# Altium PCB 50VBoost.PcbDoc
Units mm, origin at the board's own origin, x right, y up, seen from the top; angles counter-clockwise.
Board outline 61 x 24 mm, 2 copper layers (Top Layer, Bottom Layer), stack 1.57 mm thick; 18 components, 11 nets, 49 pads, 76 vias.
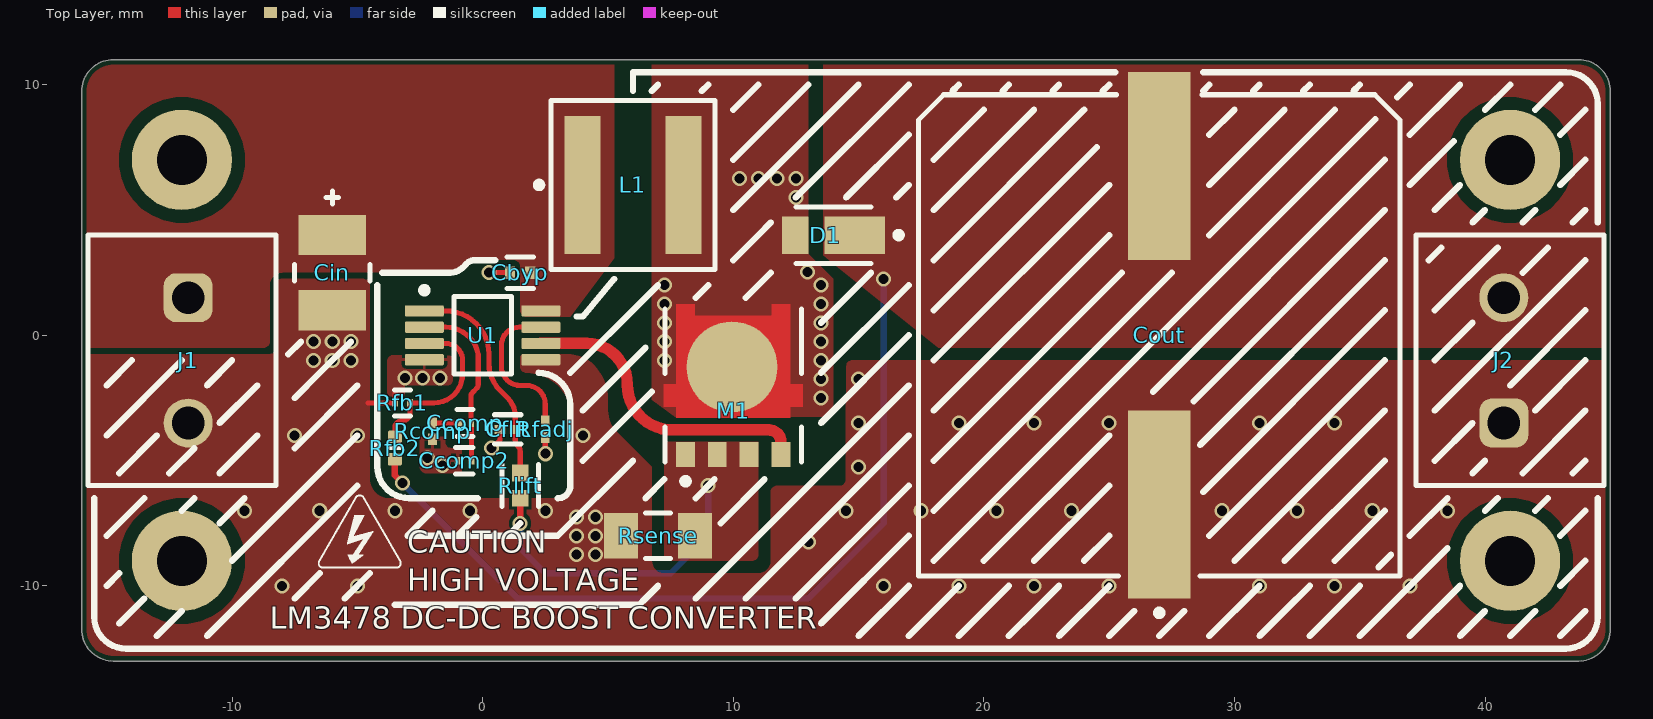
[diagram p0: Top Layer view]
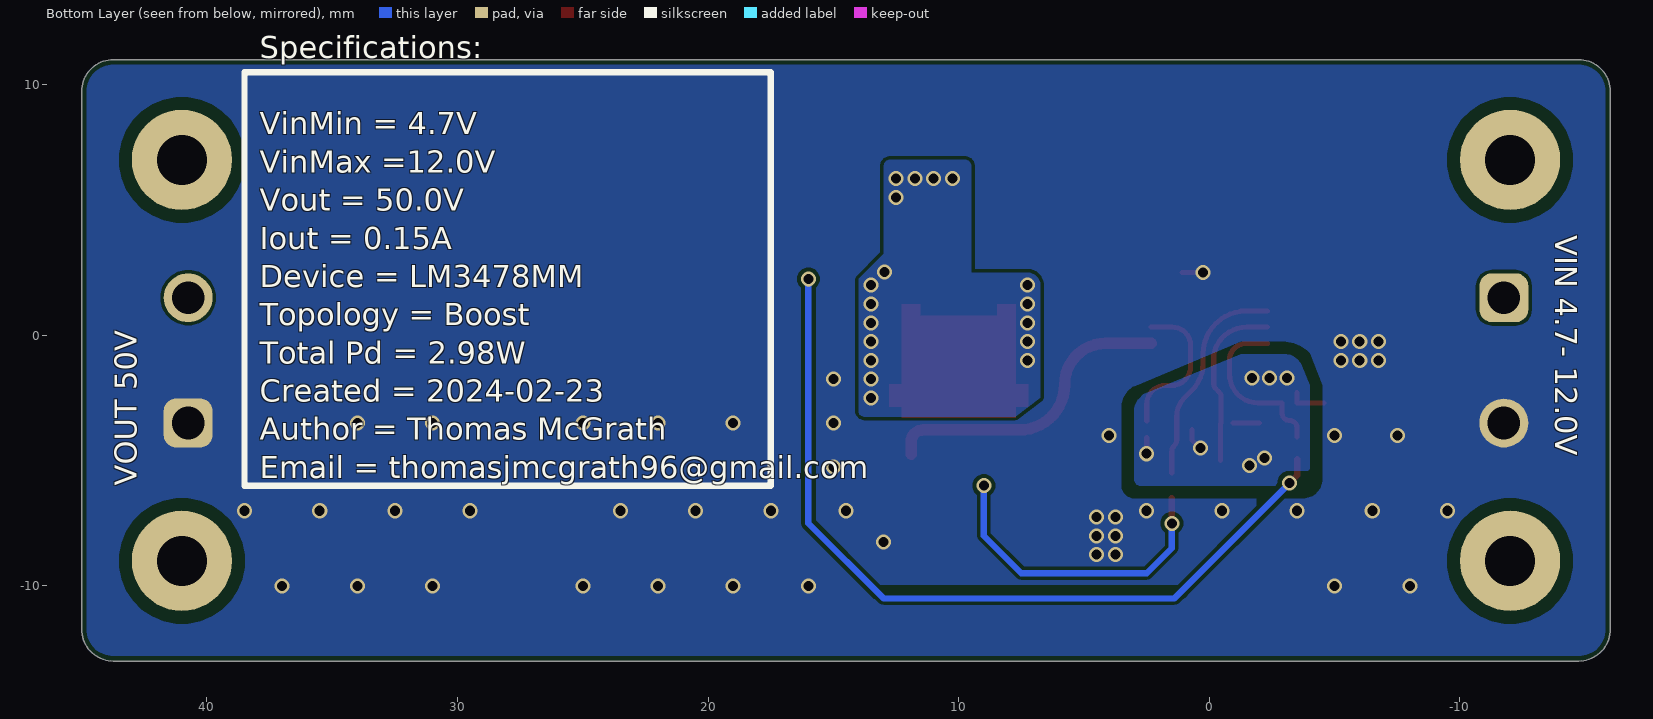
[diagram p1: Bottom Layer view, seen from below]
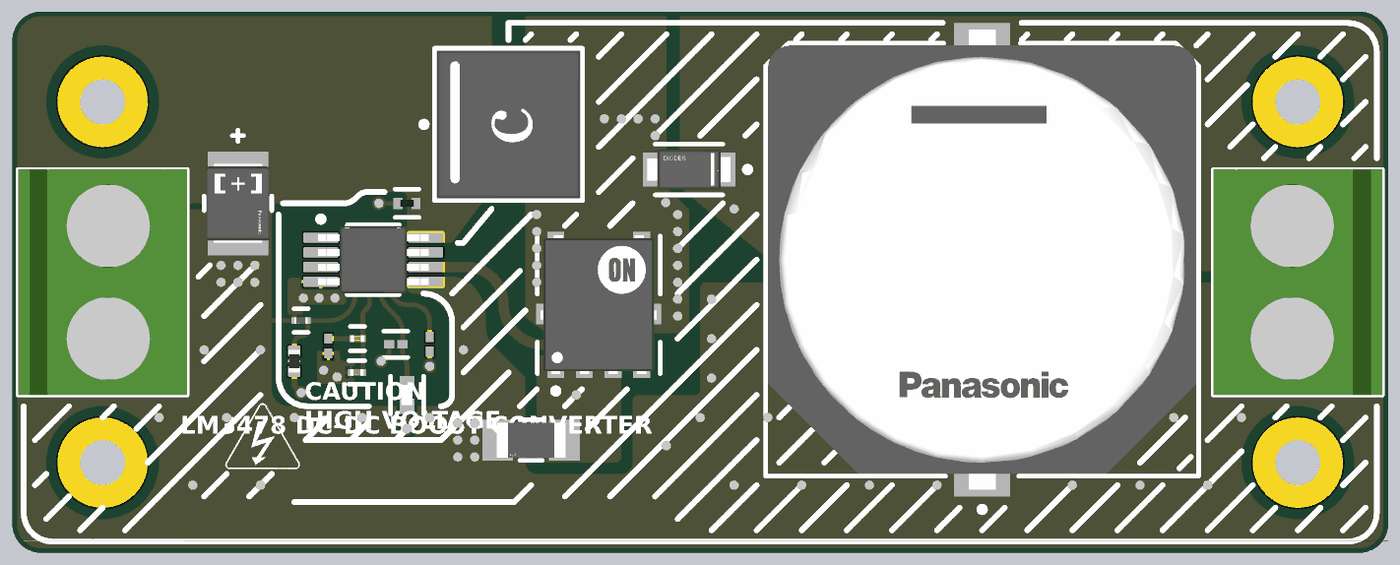
[diagram p2: 3D render of the assembled board from above, using the file's embedded part models]

## Layer stack, top to bottom
Top Solder: solder mask 0.0127, Solder Resist, Dk 3.8
Top Layer: signal copper 0.035
Dielectric: core 1.5, FR-4, Dk 4.5
Bottom Layer: signal copper 0.035
Bottom Solder: solder mask 0.0127, Solder Resist, Dk 3.8

## Board outline
-16,-11.73 ccw(c-14.73,-11.73) -14.73,-13 43.73,-13 ccw(c43.73,-11.73) 45,-11.73 45,9.73 ccw(c43.73,9.73) 43.73,11 -14.73,11 ccw(c-14.73,9.73) -16,9.73

## Design rules (kind name [scope] priority, off if disabled: settings)
BoardOutlineClearance [All] p1: gap=0.2 ignorepadtopadclearanceinfootprint=FALSE
Clearance [All] p1: gap=0.127 ignorepadtopadclearanceinfootprint=FALSE except(0.25: Arc-Hole Track-Hole SMDPad-Hole THPad-Hole Via-Hole Fill-Hole Poly-Hole Region-Hole Text-Hole)
ComponentClearance [All] p1: gap=0.127 collisioncheckmode=3 verticalgap=0.127 showdistances=TRUE
DiffPairsRouting [All] p1: maxlimit=0.254 minlimit=0.127 mostfreqgap=0.127 toplayer_minwidth=0.127 toplayer_maxwidth=25.4 toplayer_prefwidth=0.127 bottomlayer_minwidth=0.127 bottomlayer_maxwidth=25.4 bottomlayer_prefwidth=0.127 maxuncoupledlength=12.7
Height [All] p1: minheight=0 maxheight=1816.048 prefheight=12.7
HoleSize [All] p1: absolutevalues=TRUE maxlimit=6.3 minlimit=0.3 maxpercent=80.000 minpercent=20.000
HoleToHoleClearance [All] p1: gap=0.25 allowstackedmicrovias=FALSE
MinimumAnnularRing [All] p1: minimumring=0.076
MinimumSolderMaskSliver [All] p1: minsoldermaskwidth=0
PlaneClearance [All] p1: clearance=0.127
PlaneConnect PlaneConnectPowerPads [InPadClass('PowerPads')] p1: planeconnectstyle=Direct reliefexpansion=0.508 reliefentries=4 reliefconductorwidth=0.254 reliefairgap=0.254
PlaneConnect [All] p2: pad.planeconnectstyle=Relief pad.reliefexpansion=0.3 pad.reliefentries=4 pad.reliefconductorwidth=0.127 pad.reliefairgap=0.127 via.planeconnectstyle=Direct via.reliefexpansion=0.3 via.reliefentries=4 via.reliefconductorwidth=0.127 via.reliefairgap=0.127
PolygonConnect PolygonConnect_1 [All vs IsNamedPolygon('+9V_L01_P007') Or IsNamedPolygon('+50_L01_P009') Or IsNamedPolygon('GND_L01_P003') Or IsNamedPolygon('MOS_D_L01_P008') Or IsNamedPolygon('MOS_S_L01_P004') Or IsNamedPolygon('GND_L02_P002') Or IsNamedPolygon('GND_L02_P014') Or IsNamedPolygon('MOS_D_L02_P011')] p1: connectstyle=Direct reliefconductorwidth=0.254 reliefentries=4 polygonreliefangle="90 Angle" airgapwidth=0.254
PolygonConnect PolygonConnectPowerPads [All vs (InPadClass('PowerPads'))] p2: connectstyle=Direct reliefconductorwidth=0.254 reliefentries=4 polygonreliefangle="90 Angle" airgapwidth=0.254
PolygonConnect [All] p3: thpad.connectstyle=Relief thpad.reliefconductorwidth=0.127 thpad.reliefentries=4 thpad.polygonreliefangle="90 Angle" thpad.airgapwidth=0.127 smdpad.connectstyle=Relief smdpad.reliefconductorwidth=0.127 smdpad.reliefentries=4 smdpad.polygonreliefangle="90 Angle" smdpad.airgapwidth=0.127 via.connectstyle=Direct via.reliefconductorwidth=0.127 via.reliefentries=4 via.polygonreliefangle="90 Angle" via.airgapwidth=0.127
RoutingVias [All] p1: holewidth=0.3 width=0.6 viastyle="Through Hole" minholewidth=0.3 minwidth=0.6 maxholewidth=0.6 maxwidth=6.6
SilkToSilkClearance [All] p1: silktosilkclearance=0
SilkToSolderMaskClearance [IsPad] p1: minsilkscreentomaskgap=0.127 clearancetoexposedcopper=TRUE
SolderMaskExpansion [All] p1: expansion=0.075 istentingtop=FALSE
Width [All] p1: maxlimit=25.4 minlimit=0.127 preferedwidth=0.127 minimp=50.000000 maximp=50.000000 favimp=50.000000
20 further rules are at their usual default settings.

## Components (designator, comment, footprint, x,y, rotation, side; value= is the part's Value field where it differs from the comment)
Cbyp "GRM155R71C104KA88D" FP-GRM15-MFG 1.5,2.5 r180 top value=100nF
Ccomp "GRM033R71C391KA01D" FP-GRM033-0_03-MFG -0.7,-3.5 r180 top value=390pF
Ccomp2 "CGA1A2X7R1H331K030BA" FP-CGA1A-0_1-0_03-MFG -0.725,-5 r180 top value=330pF
Cflit "CL02C560JQ2ANNC" FP-CL02-IPC_A 1,-3.75 r180 top value=56pF
Cin "22uf" FP-POSCAP-B2-MFG -6,2.5 r90 top
Cout "EEV-FK2A221M" FP-FKK16-MFG 27,0 r90 top value=220uF
D1 "DFLS12007" FP-PowerDI123-MFG 14,4 r0 top value=23pF
J1 "691137710002" 691137710002 -12,-1 r270 top
J2 "691137710002" 691137710002 41,-1 r90 top
L1 "XAL6060-103MEB" FP-XAL6060-MFG 6,6 r0 top value=10uH
M1 "NVMFS6B14NLT1G" FP-488AA-MFG 10,-2 r0 top
Rcomp "162k" RESC0603X26X15NL03T05 -2,-3.825 r270 top
Rfadj "ERJ-1GEF1212C" RESC0603X26X15NL03T05 2.5,-3.75 r270 top value=12.1kR
Rfb1 "ERJ-1GNF1002C" FP-ERJ1G-MFG -3.2,-2.7 r180 top value=10kR
Rfb2 "Resistor 383K +/-1 % 0402 63 mW" RESC0402(1005)_L -3.5,-4.5 r270 top value=383k
Rlift "CRCW0402100RFKED" FP-CRCW0402-e3-IPC_A 1.5,-6 r270 top value=100R
Rsense "CSR1206FK20L0" FP-CSR1206-IPC_A 7,-8 r180 top value=20mR
U1 "LM3478MM/NOPB" DGK0008A_M 0,0 r0 top

## Footprints (in the part's own frame and the unit in brackets; to place one, negate y for a bottom-side part, rotate by r counter-clockwise, add the part's x,y. Pads: shape width x height; smd on the part's side, far side on the other; paste and mask are expansions set on the pad)
691137710002 [mm] "Horizontal Cable Entry with Pressure Clamp, pitch 5mm, 02p"
  rrect50% 1.95x1.95 hole 1.3: 1(-2.5,0.25)
  round 1.95 hole 1.3: 2(2.5,0.25)
  silkscreen extent -5,-3.75 5,3.75, body extent -5,-3.75 5,3.75, height 11.6
DGK0008A_M [mm] "TSOP, 8-Leads, Body 3.1x3.1mm, Pitch 0.65mm, IPC Low Density"
  rrect22% 1.55x0.45 smd: 1(-2.325,0.975) 2(-2.325,0.325) 3(-2.325,-0.325) 4(-2.325,-0.975) 5(2.325,-0.975) 6(2.325,-0.325) 7(2.325,0.325) 8(2.325,0.975)
  silkscreen extent -2.45,-1.55 1.15,1.92, body extent -2.45,-1.5 2.45,1.5, height 0.94
FP-488AA-MFG [mm]
  rect 0.75x1 smd paste+0 mask+0: 1(-1.905,-2.748) 2(-0.635,-2.748) 3(0.635,-2.748) 4(1.905,-2.748)
  round 3.631 smd paste+0 mask+0: 5-6(-0.05,0.735)
  Top Layer region: -2.28,-1.282 -2.28,-0.857 -2.775,-0.857 -2.775,0.048 -2.28,0.048 -2.28,3.247 -1.53,3.247 -1.53,2.772 1.53,2.772 1.53,3.247 2.28,3.247 2.28,0.048 2.775,0.048 2.775,-0.857 2.28,-0.857 2.28,-1.282
  silkscreen extent -2.73,-3.95 2.73,3.05, body extent -2.88,-3.35 2.88,3.35, height 0.25
FP-CGA1A-0_1-0_03-MFG [mm]
  rect 0.25x0.3 smd paste+0 mask+0: 1(-0.275,0) 2(0.275,0)
  silkscreen extent -0.35,-0.53 0.35,0.53, body extent -0.5,-0.3 0.5,0.3, height 0.25
FP-CL02-IPC_A [mm]
  rect 0.456x0.361 smd paste+0 mask+0: 1(-0.303,0) 2(0.303,0)
  silkscreen extent -0.53,-0.58 0.53,0.58, body extent -0.73,-0.38 0.73,0.38, height 0.25
FP-CRCW0402-e3-IPC_A [mm]
  rect 0.668x0.672 smd paste+0 mask+0: 1(-0.502,0) 2(0.502,0)
  silkscreen extent -0.84,-0.74 0.84,0.74, body extent -1.04,-0.54 1.04,0.54, height 0.25
FP-CSR1206-IPC_A [mm]
  rect 1.356x1.808 smd paste+0 mask+0: 1(-1.476,0) 2(1.476,0)
  silkscreen extent -0.5,-0.9 0.5,0.9, body extent -2.65,-1.4 2.65,1.4, height 0.25
FP-ERJ1G-MFG [mm]
  rect 0.25x0.3 smd paste+0 mask+0: 1(-0.3,0) 2(0.3,0)
  silkscreen extent -0.32,-0.53 0.31,0.53, body extent -0.53,-0.27 0.52,0.27, height 0.25
FP-FKK16-MFG [mm]
  rect 7.5x2.5 smd paste+0 mask+0: 1(-6.75,0) 2(6.75,0)
  silkscreen extent -11.2,-9.6 9.6,9.6, body extent -10.75,-9.85 10.75,9.85, height 0.25
FP-GRM15-MFG [mm]
  rect 0.4x0.5 smd paste+0 mask+0: 1(-0.4,0) 2(0.4,0)
  silkscreen extent -0.53,-0.63 0.53,0.63, body extent -0.7,-0.38 0.7,0.38, height 0.25
FP-GRM033-0_03-MFG [mm]
  rect 0.25x0.3 smd paste+0 mask+0: 1(-0.238,0) 2(0.238,0)
  silkscreen extent -0.31,-0.54 0.32,0.54, body extent -0.46,-0.27 0.46,0.27, height 0.25
FP-POSCAP-B2-MFG [mm]
  rect 1.6x2.7 smd paste+0 mask+0: 1(-1.5,0) 2(1.5,0)
  silkscreen extent -0.33,-1.5 3.25,1.5, body extent -2.4,-1.6 2.4,1.6, height 0.25
FP-PowerDI123-MFG [mm]
  rect 2.4x1.5 smd paste+0 mask+0: 1(0.85,0)
  rect 1.05x1.5 smd paste+0 mask+0: 2(-1.525,0)
  silkscreen extent -1.5,-1.12 2.73,1.12, body extent -2.15,-1.06 2.15,1.06, height 0.25
FP-XAL6060-MFG [mm]
  rect 1.43x5.5 smd paste+0 mask+0: 1(-2.02,0) 2(2.02,0)
  silkscreen extent -3.87,-3.38 3.28,3.38, body extent -3.38,-3.48 3.38,3.48, height 0.25
RESC0402(1005)_L [mm] "Chip Resistor, Body 1.0x0.5mm, IPC High Density"
  rrect25% 0.5x0.55 smd: 1(-0.45,0) 2(0.45,0)
  silkscreen extent 0,-0.2 0,0.2, body extent -0.5,-0.25 0.5,0.25, height 0.3
RESC0603X26X15NL03T05 [mm] "Chip Resistor, 2-Leads, Body 0.60x0.30mm, IPC Medium Density"
  rect 0.45x0.35 smd: 1(-0.325,0) 2(0.325,0)
  body extent -0.32,-0.16 0.32,0.17, height 0.26

## Part data
Cbyp: library part CMP-001-00088-1, "Multilayer Ceramic Capacitor, 0.1 uF, 16 V, ± 10%, X7R, 0402 [1005 Metric]", Case Code (Imperial)=0402, Case Code (Metric)=1005, Dielectric=X7R, Dielectric Material=Ceramic, Max Operating Temperature=125°C, Min Operating Temperature=-55°C, Package Quantity=1, Tolerance=10%, Voltage=16V, Case/Package=0402, Depth=0.5mm, Height=0.5mm, Lead Free="Lead Free", Length=1mm, Material=Ceramic, Mounting Technology="Surface Mount", Packaging="Tape and Reel", Pins=2, Radiation Hardening=No, Reach SVHC Compliant=Unknown, RoHS Compliant=Yes, Series=GRM, Termination=SMD/SMT, Thickness=0.022inch, Voltage Rating=16V, Voltage Rating (DC)=16V, Width=0.02inch
Ccomp: library part CMP-001-00093-1, "Cap Ceramic 390pF 16V X7R 10% SMD 0201 125°C Paper T/R", Case Code (Imperial)=0201, Case Code (Metric)=0603, Dielectric=X7R, Max Operating Temperature=125°C, Min Operating Temperature=-55°C, Package Quantity=15000, Tolerance=10%, Voltage Rating=16V, Case/Package=0201, Construction=Flat, Depth=0.3mm, Height=0.3mm, Length=0.6mm, Mounting Technology="Surface Mount", Packaging="Tape and Reel", Radiation Hardening=No, RoHS Compliant=Yes, Series=GRM, Termination=SMD/SMT, Thickness=0.013inch, Voltage Rating (DC)=16V, Width=0.012inch
Ccomp2: library part CMP-001-00094-1, "Cap Ceramic 330pF 50V X7R 10% Pad SMD 0201 125C Automotive T/R", Case Code (Imperial)=0201, Case Code (Metric)=0603, Dielectric=X7R, Max Operating Temperature=125°C, Min Operating Temperature=-55°C, Package Quantity=1, Ratings=AEC-Q200, Tolerance=10%, Voltage Rating=50V, Case/Package=0201, Height=0.3mm, Length=0.024inch, Mounting Technology="Surface Mount", Packaging="Tape and Reel", RoHS Compliant=Yes, Series=CGA, Termination=SMD/SMT, Thickness=0.012inch, Voltage Rating (DC)=50V, Weight=6E-06oz, Width=0.012inch
Cflit: library part CMP-001-00092-1, "Cap Ceramic 56pF 6.3V C0G 5% SMD 01005 125°C Cardboard T/R", Case Code (Imperial)=1005, Case Code (Metric)=0402, Case/Package=Ceramic, Dielectric=C0G, Max Operating Temperature=125°C, Min Operating Temperature=-55°C, Package Quantity=1, Tolerance=5%, Voltage Rating=6.3V, Construction=Flat, Depth=0.2mm, Height=0.2mm, Length=0.4mm, Mounting Technology="Surface Mount", Packaging="Tape and Reel", Radiation Hardening=No, RoHS Compliant=Yes, Series=CL, Thickness=0.009inch, Width=0.008inch
Cin: library part CMP-001-00091-1, "Cap Tant Solid 22uF 20V B2 CASE 20% (3.5 X 2.8 X 1.9mm) SMD 3528 0.09 Ohm 105 C Embossed T/R"
Cout: library part CMP-001-00095-1, "Aluminum Electrolytic Capacitor, Polarized, Aluminum (wet), 35V, 20% +Tol, 20% -Tol, 100uF", Case/Package=Radial, Dielectric Material=Aluminium, ESR (Equivalent Series Resistance)=153mR, Leakage Current=3uA, Max Operating Temperature=105°C, Min Operating Temperature=-55°C, Package Quantity=125, Ratings=AEC-Q200, Ripple Current=917mA, Tolerance=20%, Voltage=100V, Construction=Cylindrical, Diameter=18mm, Dissipation Factor=7%, Height=16.5mm, Impedance=153mR, Lead Free="Lead Free", Length=17mm, Life (Hours)=5000Hour, Mounting Technology="Surface Mount,PCB", Packaging="Tape and Reel", Pins=2, Radiation Hardening=No, Reach SVHC Compliant=No, Ripple Current (AC)=917mA, RoHS Compliant=Yes, Series=FK, Termination=SMD/SMT, Voltage Rating=100V, Voltage Rating (AC)=100V, Voltage Rating (DC)=100V, Width=1.2mm
D1: library part CMP-004-00032-1, "Rectifier Diode, Schottky, 1 Phase, 1 Element, 1A, 200V V(RRM), Silicon", Average Rectified Current=1A, Forward Voltage=850mV, Max Forward Surge Current (Ifsm)=40A, Max Operating Temperature=150°C, Max Repetitive Reverse Voltage (Vrrm)=200V, Max Reverse Current=2uA, Min Operating Temperature=-65°C, Package Quantity=3000, Contact Plating=Tin,Matte, Current Rating=1A, Element Configuration=Single, Forward Current=1A, Height=0.98mm, Lead Free="Lead Free", Length=2.8mm, Max Reverse Voltage (DC)=200V, Mounting Technology="Surface Mount", Output Current=1A, Packaging="Cut Tape", Peak Non-Repetitive Surge Current=40A, Pins=123, Polarity=Standard, Radiation Hardening=No, Reach SVHC Compliant=Yes, Series=DFLS1200, Termination=SMD/SMT, Voltage Rating (DC)=200V, Weight=1.058219oz, Width=1.78mm
J1 J2: library part CMP-002-00088-1, "Series 1377 - 5.00 mm Horizontal Entry with Pressure Clamp WR-TBL, 2 pin", Color=Green, Current=16A, Max Operating Temperature=120°C, Min Operating Temperature=-30°C, Voltage=300V, Contact Material=Nickel,Tin, Current Rating=16A, Height=11.6mm, Housing Material=PC, Lead Pitch=5mm, Mounting Technology="Through Hole", Number of Contacts=2, Number of Levels=1, Number of Positions Per Level=2, Number of Rows=1, Pins=2, Plating="Copper Alloy,ZINC PLATED", RoHS Compliant=Yes, Series="WR-TBL Series 1377", Termination=Screw, Voltage Rating=300V, Wire Gauge (Max)=30AWG, Wire Gauge (Min)=12AWG
L1: library part CMP-006-00022-1, "Power inductor, shielded, 20% tol, SMT, RoHS, halogen f", Max DC Current=7A, Max Operating Temperature=125°C, Min Operating Temperature=-40°C, Package Quantity=21, Self Resonant Frequency=14MHz, Test Frequency=100kHz, Tolerance=20%, Core Material=Composite, Height=6.1mm, Lead Free="Contains Lead", Length=6.76mm, Packaging="Tape and Reel", RoHS Compliant=Yes, Series=XAL6060, Shielding=Shielded, Termination=SMD/SMT, Width=6.56mm
M1: library part CMP-013-00037-1, "Single N-Channel Power MOSFET 100V, 55A, 13mΩ", Case/Package=DFN, Continuous Drain Current (ID)=55A, Drain to Source Voltage (Vdss)=100V, Input Capacitance=1.68nF, Max Operating Temperature=175°C, Max Power Dissipation=94W, Min Operating Temperature=-55°C, Threshold Voltage=3V, Lead Free="Lead Free", Mounting Technology="Surface Mount", Packaging="Cut Tape", Pins=8, Rds On Max=13mR, Reach SVHC Compliant=No, RoHS Compliant=Yes, Series="Automotive, AEC-Q101"
Rcomp: library part CMP-009-00195-1, "Res, Thick Film, 162K, 1%, 0.05W, 0201"
Rfadj: library part CMP-009-00192-1, "Res Thick Film 0201 12.1K Ohm 1% 1/20W ±200ppm/°C Molded SMD Pressed Carrier T/R", Case Code (Imperial)=0201, Case Code (Metric)=0603, Max Operating Temperature=125°C, Max Power Dissipation=50mW, Min Operating Temperature=-55°C, Package Quantity=15000, Temperature Coefficient=200ppm/°C, Tolerance=1%, Voltage Rating=25V, Voltage Rating (DC)=15V, Case/Package=0201, Contact Plating=Tin, Height=0.01inch, Lead Free="Lead Free", Length=0.024inch, Mounting Technology="Surface Mount", Number of Terminations=2, Packaging="Tape and Reel", Power Rating=50mW, Radiation Hardening=No, RoHS Compliant=Yes, Series=ERJ, Termination=SMD/SMT, Weight=6E-06oz, Width=0.3mm
Rfb1: library part CMP-009-00191-1, "SMD Chip Resistor, 10 kOhm, ± 1%, 50 mW, 0201 [0603 Metric], Thick Film, General Purpose", Case Code (Imperial)=0201, Case Code (Metric)=0603, Max Operating Temperature=125°C, Max Power Dissipation=50mW, Min Operating Temperature=-55°C, Package Quantity=15000, Ratings=AEC-Q200, Resistance Tolerance=1%, Resistor Type="Thick Film", Temperature Coefficient=200ppm/°C, Voltage Rating=25V, Case/Package=0201, Contact Plating=Tin,Matte, Features="Automotive AEC-Q200", Height=0.01inch, Lead Free="Lead Free", Length=0.024inch, Mounting Technology="Surface Mount", Number of Terminations=2, Packaging="Tape and Reel", Pins=2, Power Rating=50mW, Radiation Hardening=No, Reach SVHC Compliant=Unknown, RoHS Compliant=Yes, Series=ERJ, Tolerance=1%, Voltage Rating (DC)=25V, Width=0.3mm
Rfb2: library part CMP-009-00126-3, "Chip Resistor, 383 kOhms, +/-1 %, 63 mW, -55 to 155 degC, 0402", Case/Package=0402, Max Operating Temperature=155°C, Min Operating Temperature=-55°C, Power=63mW, Tolerance=1%, Pins=2
Rlift: library part CMP-009-00193-1, "SMD Chip Resistor, 100 Ohm, ± 1%, 63 mW, 0402 [1005 Metric], Thick Film, General Purpose", Case Code (Imperial)=0402, Case Code (Metric)=1005, Max Operating Temperature=155°C, Max Power Dissipation=63mW, Min Operating Temperature=-55°C, Package Quantity=10, Ratings=AEC-Q200, Resistance Tolerance=1%, Resistor Type="Thick Film", Temperature Coefficient=100ppm/°C, Voltage Rating=50V, Case/Package=0402, Construction=Rectangular, Contact Plating=Tin, Depth=0.5mm, Features="Automotive AEC-Q200", Height=0.35mm, Lead Free="Lead Free", Length=1mm, Military Standard=Not, Number of Terminations=2, Packaging="Tape and Reel", Power Rating=63mW, Radiation Hardening=No, Reach SVHC Compliant=Unknown, RoHS Compliant=Yes, Series=CRCW, Technology="THICK FILM", Termination=SMD/SMT, Tolerance=1%, Voltage Rating (DC)=50V, Weight=2.3E-05oz, Width=0.02inch, Working Voltage=50V
Rsense: library part CMP-009-00194-1, "Res Thick Film 1206 0.02 Ohm 1% 1/2W ±100ppm/°C Molded SMD SMD Paper T/R", Case Code (Imperial)=1206, Case Code (Metric)=3216, Max Operating Temperature=155°C, Max Power Dissipation=500mW, Min Operating Temperature=-55°C, Temperature Coefficient=100ppm/°C, Tolerance=1%, Case/Package=1206, Construction=Rectangular, Contact Plating=Tin,Matte, Depth=1.55mm, Height=0.026inch, Lead Free="Lead Free", Length=0.12inch, Military Standard=Not, Mounting Technology="Surface Mount", Number of Terminations=2, Packaging="Tape and Reel", Power Rating=500mW, Radiation Hardening=No, RoHS Compliant=Yes, Series=CSR, Width=0.061inch
U1: library part CMP-019-00052-1, "IC REG CTRLR MULT TOP 8VSSOP", Case/Package=MSOP, Frequency=400kHz, Max Operating Temperature=125°C, Max Output current=2A, Max Output Voltage=5V, Max Supply Voltage=40V, Min Input Voltage=2.97V, Min Operating Temperature=-40°C, Output Current=1A, Output Voltage=1.26V, Package Quantity=1000, Quiescent Current=2.7mA, Switching Frequency=1MHz, Clock Sync=No, Height=0.86mm, Lead Free="Lead Free", Length=3mm, Max Duty Cycle=100%, Min Supply Voltage=2.97V, Mounting Technology="Surface Mount", Number of Output Phases=1, Number of Outputs=1, Output Configuration=Positive, Output Type=Adjustable, Packaging="Tape and Reel", Pins=8, Radiation Hardening=No, Reach SVHC Compliant=No, RoHS Compliant=Yes, Series=-, Synchronous Rectifier=No, Termination=SMD/SMT, Topology=Boost,Flyback,SEPIC, Width=3mm

## Free pads (board coordinates)
  round 4 hole 2: 0(-12,-9) 0(-12,7) 0(41,-9) 0(41,7)

## Via types
v1: diameter 0.6, hole 0.4, Top Layer to Bottom Layer, tented both sides, 76 vias

## Nets (pads, with @x,y where several pads share a name; then routed paths per layer and width w, separated by ;. In a path a pad name is that pad's centre, name@x,y a point inside that pad or via, vN(x,y) a via of type N, cw(c..) or ccw(c..) an arc to the next point about the centre after c; other vN are vias at no path point)
+9V: Cbyp.1 Cin.2 J1.1 L1.1 U1.8
+50: Cout.2 D1.1 J2.2 Rfb2.2 | length 33.2
  Top Layer w0.254: Rfb2.2 -3.5,-5.581 -3.2,-5.881 v1(-3.2,-5.9)
  Bottom Layer w0.254: v1(-3.2,-5.9) 1.4,-10.5 13,-10.5 16,-7.5 v1(16,2.25)
COMP: Ccomp2.1 Ccomp.1 U1.2 | length 7
  Top Layer w0.203: U1.2 -1.475,0.325 cw(c-1.475,-0.995) -0.175,-0.766 -0.175,-1.966 cw(c-0.378,-1.966) -0.234,-2.109 -0.403,-2.278 ccw(c-0.259,-2.422) -0.462,-2.422 Ccomp.1 -0.45,-3.548 Ccomp2.1
DR: M1.4 U1.6 | length 12.3
  Top Layer w0.457: U1.6 4.15,-0.325 cw(c4.15,-1.95) 5.775,-1.95 5.775,-1.975 ccw(c7.575,-1.975) 7.575,-3.775 11.425,-3.775 cw(c11.425,-4.25) 11.9,-4.25 11.905,-4.25 M1.4
FA/SD: Rfadj.1 U1.7 | length 6.1
  Top Layer w0.203: U1.7 1.475,0.325 ccw(c1.475,-0.4) 0.75,-0.4 0.75,-1.25 ccw(c1.5,-1.25) 1.5,-2 1.75,-2 cw(c1.75,-2.75) 2.5,-2.75 Rfadj.1
FB: Rfb1.1 Rfb2.1 U1.3 | length 6.9
  Top Layer w0.203: Rfb2.1 -3.5,-3.7 cw(c-3.2,-3.7) -3.2,-3.4 ccw(c-3.2,-3.1) -2.9,-3.1 Rfb1.1 -1.95,-2.7 ccw(c-1.95,-1.55) -0.8,-1.55 -0.8,-1 ccw(c-1.475,-1) -1.475,-0.325 U1.3
GND: Cbyp.2 Ccomp2.2 Cflit.2 Cin.1 Cout.1 J1.2 J2.1 Rcomp.2 Rfadj.2 Rfb1.2 Rsense.2 U1.4 U1.5 | length 3.9
  Top Layer w0.203: -4.575,-2.7 Rfb1.2 -3.5,-2.275 ; v1(0.25,2.5) 1.002,2.5 Cbyp.2 ; v1(0.35,-4.5) 0.375,-4.5 0.7,-4.175 0.7,-3.829 0.697,-3.826 Cflit.2 ; v1(2.5,-4.725) Rfadj.2
  other v1: -8,-10 -5,-10 16,-10 19,-10 22,-10 25,-10 31,-10 34,-10 37,-10 3.75,-8.75 4.5,-8.75 13,-8.25 3.75,-8 4.5,-8 3.75,-7.25 4.5,-7.25 -9.5,-7 -6.5,-7 -3.5,-7 -0.5,-7 2.5,-7 14.5,-7 17.5,-7 20.5,-7 23.5,-7 29.5,-7 32.5,-7 35.5,-7 38.5,-7 15,-5.25 -1.6,-5.2 -2.2,-4.9 -7.5,-4 -5,-4 4,-4 15,-3.5 19,-3.5 22,-3.5 25,-3.5 31,-3.5 34,-3.5 15,-1.75 -3.1,-1.7 -2.4,-1.7 -1.7,-1.7 -6.75,-1 -6,-1 -5.25,-1 -6.75,-0.25 -6,-0.25 -5.25,-0.25
ISEN: Cflit.1 Rlift.1 U1.1 | length 8.7
  Top Layer w0.203: U1.1 -1.475,0.975 cw(c-1.475,-0.75) 0.25,-0.75 0.25,-1.126 ccw(c1.757,-1.126) 0.691,-2.191 1,-2.5 cw(c0.269,-3.231) 1.303,-3.231 Cflit.1 1.303,-4.165 ccw(c1.635,-4.165) 1.4,-4.4 cw(c1.159,-4.641) 1.5,-4.641 Rlift.1
MOS_D: D1.2 L1.2 M1.5-6
  other v1: 13.5,-2.5 13.5,-1.75 7.25,-1 13.5,-1 7.25,-0.25 13.5,-0.25 7.25,0.5 13.5,0.5 7.25,1.25 13.5,1.25 7.25,2 13.5,2 12.97,2.53 12.5,5.5 10.25,6.25 11,6.25 11.75,6.25 12.5,6.25
MOS_S: M1.1 M1.2 M1.3 Rlift.2 Rsense.1 | length 12.5
  Top Layer w0.254: v1(1.5,-7.5) Rlift.2
  Bottom Layer w0.254: v1(1.5,-7.5) 1.5,-8.5 2.5,-9.5 7.5,-9.5 9,-8 v1(9,-6)
NetCcomp_2: Ccomp.2 Rcomp.1 | length 1.1
  Top Layer w0.203: Rcomp.1 Ccomp.2

## Polygon pours and split planes (outlines as drawn)
GND on Top Layer "GND_L01_P003" (solid, remove dead copper, pour order 3): 14.25,-6 11.75,-6 ccw(c11.75,-6.25) 11.5,-6.25 11.5,-9 cw(c11,-9) 11,-9.5 7.25,-9.5 cw(c7.25,-9) 6.75,-9 6.75,-5.25 5.354,-3.854 cw(c6.207,-3) 5,-3 5,-2.561 ccw(c3.043,-2.561) 4.427,-1.177 ccw(c3.397,-2.207) 3.396,-0.75 1.5,-0.75 1.5,-1.25 ccw(c1.75,-1.25) 1.75,-1.5 cw(c1.75,-3.311) 3.03,-2.03 cw(c1.896,-3.164) 3.5,-3.164 3.5,-6 cw(c3,-6) 3,-6.5 -3.75,-6.5 cw(c-3.75,-5.75) -4.5,-5.75 -4.5,2 ccw(c-4.75,2) -4.75,2.25 -8,2.25 ccw(c-8,2) -8.25,2 -8.25,-0.5 cw(c-8.5,-0.5) -8.5,-0.75 -16,-0.75 -16,-13 45,-13 45,-1 14.75,-1 ccw(c14.75,-1.25) 14.5,-1.25 14.5,-5.75 cw(c14.25,-5.75)
GND on Top Layer "GND_L01_P013" (solid, remove dead copper, pour order 13): -1.5,-4.05 -1.5,-4.25 ccw(c-1.25,-4.25) -1.25,-4.5 -0.825,-4.5 -0.825,-5.5 -2.25,-5.5 cw(c-2.25,-5.25) -2.5,-5.25 -2.5,-4.05
MOS_S on Top Layer "MOS_S_L01_P004" (solid, remove dead copper, pour order 4): 7.25,-4.25 11,-4.25 11,-8.75 cw(c10.75,-8.75) 10.75,-9 7.5,-9 cw(c7.5,-8.75) 7.25,-8.75
+9V on Top Layer "+9V_L01_P007" (solid, remove dead copper, pour order 7): -8,2.5 -1,2.5 ccw(c-1,2.75) -0.75,2.75 cw(c-0.5,2.75) -0.5,3 1.25,3 cw(c1.25,2.75) 1.5,2.75 1.5,1 ccw(c1.75,1) 1.75,0.75 3.5,0.75 5.25,3.083 5.25,11 -16,11 -16,-0.5 -8.75,-0.5 ccw(c-8.75,-0.25) -8.5,-0.25 -8.5,2 cw(c-8,2)
MOS_D on Top Layer "MOS_D_L01_P008" (solid, remove dead copper, pour order 8): 7.72,-3.283 13.749,-3.251 ccw(c13.747,-2.999) 14,-2.999 14,2.25 13,3.25 13,11 6.75,11 6.75,2.25 6.75,-2.565
+50 on Top Layer "+50_L01_P009" (solid, remove dead copper, pour order 9): 45,-0.5 45,11 13.6,11 13.6,3.2 14.2,2.7 18.184,-0.5
GND on Top Layer "GND_L01_P012" (solid, remove dead copper, pour order 12): -3.1,-2 -1.4,-2 ccw(c-1.4,-1.8) -1.2,-1.8 -1.2,-0.9 -1.3,-0.8 -3.6,-0.8 ccw(c-3.6,-1) -3.8,-1 -3.8,-2.8 ccw(c-3.6,-2.8) -3.6,-3 -3.3,-3 ccw(c-3.3,-2.8) -3.1,-2.8
GND on Bottom Layer "GND_L02_P014" (solid, remove dead copper, pour order 14): -16,11 45,11 45,-13 -16,-13
GND on Bottom Layer "GND_L02_P002" (solid, remove dead copper, pour order 2): -3.5,-0.75 -4,-2 -4,-5.75 ccw(c-3.75,-5.75) -3.75,-6 2.75,-6 ccw(c2.75,-5.75) 3,-5.75 3,-2.5 -1.25,-0.75
MOS_D on Bottom Layer "MOS_D_L02_P011" (solid, remove dead copper, pour order 11): 13.75,-3.25 7.75,-3.25 6.75,-2.5 6.75,2 cw(c7.25,2) 7.25,2.5 9.5,2.5 9.5,6.75 cw(c9.75,6.75) 9.75,7 12.75,7 cw(c12.75,6.75) 13,6.75 13,3.25 14,2.25 14,-3 cw(c13.75,-3)

## Other copper
Top Layer:
  pour cut-out: -12,9.5 cw(c-12,7) -9.5,7 cw(c-12,7) -12,4.5 cw(c-12,7) -14.5,7 cw(c-12,7) -12,9.5
  pour cut-out: -12,-6.5 cw(c-12,-9) -9.5,-9 cw(c-12,-9) -12,-11.5 cw(c-12,-9) -14.5,-9 cw(c-12,-9) -12,-6.5
  pour cut-out: 41,-6.5 cw(c41,-9) 43.5,-9 cw(c41,-9) 41,-11.5 cw(c41,-9) 38.5,-9 cw(c41,-9) 41,-6.5
  pour cut-out: 41,9.5 cw(c41,7) 43.5,7 cw(c41,7) 41,4.5 cw(c41,7) 38.5,7 cw(c41,7) 41,9.5
Bottom Layer:
  pour cut-out: -2.197,-6.5 -1.9,-6.5 -1.9,-6.799
  pour cut-out: -3.003,-6.5 0.8,-10.3 0.949,-10.449 0.949,-10.451 ccw(c1.15,-10.25) 1.15,-10.535 13.25,-10.535 ccw(c13.25,-10.25) 13.451,-10.451 16.201,-7.701 ccw(c16,-7.5) 16.285,-7.5 16.285,1.898 15.715,1.898 15.715,-7.382 13.132,-9.965 1.268,-9.965 -2.197,-6.5
  pour cut-out: -12,9.5 cw(c-12,7) -9.5,7 cw(c-12,7) -12,4.5 cw(c-12,7) -14.5,7 cw(c-12,7) -12,9.5
  pour cut-out: -12,-6.5 cw(c-12,-9) -9.5,-9 cw(c-12,-9) -12,-11.5 cw(c-12,-9) -14.5,-9 cw(c-12,-9) -12,-6.5
  pour cut-out: 41,-6.5 cw(c41,-9) 43.5,-9 cw(c41,-9) 41,-11.5 cw(c41,-9) 38.5,-9 cw(c41,-9) 41,-6.5
  pour cut-out: 41,9.5 cw(c41,7) 43.5,7 cw(c41,7) 41,4.5 cw(c41,7) 38.5,7 cw(c41,7) 41,9.5
  pour cut-out: -4.002,-0.707 cw(c-2.905,-1.804) -2.905,-0.252 -1.244,-0.252 2.923,-2.007 cw(c2.556,-2.876) 3.5,-2.877 3.5,-4.25 3,-4.25 3,-3 ccw(c2.331,-3) 2.804,-2.527 2.636,-2.359 -1.25,-0.75 -3.029,-0.75 ccw(c-3.029,-1.416) -3.5,-0.945 -3.637,-1.116 -4,-2 -4.5,-2
  pour cut-out: -3.325,-5.4 -3.9,-5.4 cw(c-3.9,-5.3) -4,-5.3 -4.2,-5.3 -4.2,-5.5 -3.4,-5.5
  pour cut-out: -1,-6 -3.75,-6 cw(c-3.75,-5.75) -4,-5.75 -4,-2 -4.5,-2 -4.5,-5.75 ccw(c-3.75,-5.75) -3.75,-6.5 -1,-6.5
  pour cut-out: -3.2,-5.4 cw(c-3.2,-5.9) -2.7,-5.9 cw(c-3.2,-5.9) -3.2,-6.4 -4.1,-6.4 -4.1,-5.4
  pour cut-out: -1,-6.5 3,-6.5 ccw(c3,-6) 3.5,-6 3.5,-4.25 3,-4.25 3,-5.75 cw(c2.75,-5.75) 2.75,-6 -1,-6

## Silkscreen, mask and mechanical layers (free items; w line width, h text height)
Top Overlay:
  drawing of 177 lines, arcs and shapes, not listed
  text "CAUTION  / HIGH VOLTAGE" at -3,-10.5 h1.52
  text "LM3478 DC-DC BOOST CONVERTER" at -8.5,-12 h1.52
Bottom Overlay:
  lines w0.254: 17.5,-6 38.5,-6 38.5,10.5 17.5,10.5 17.5,-6
  text "VIN 4.7- 12.0V" at -13.5,4 h1.52 r90
  text "Specifications: /  / VinMin = 4.7V / VinMax =12.0V / Vout = 50.0V / Iout = 0.15A / Device = LM3478MM / Topology = Boost / Total Pd = 2.98W / Created = 2024-02-23 / Author = Thomas McGrath / Email = thomasjmcgrath96@gmail.com" at 37.899,-6 h1.52
  text "VOUT 50V" at 42.5,-6 h1.52 r270
Mechanical 1:
  lines w0.001: -16,-11.73 ccw(c-14.73,-11.73) -14.73,-13 5,-13 43.73,-13 ccw(c43.73,-11.73) 45,-11.73 45,9.73 ccw(c43.73,9.73) 43.73,11 -14.73,11 ccw(c-14.73,9.73) -16,9.73 -16,2 -16,-11.73